# Altium PCB PCBDesign.PcbDoc
Units mm, origin at the board's own origin, x right, y up, seen from the top; angles counter-clockwise.
Board outline 100 x 75 mm, 2 copper layers (Top Layer, Bottom Layer); 33 components, 25 nets, 90 pads, 0 vias.
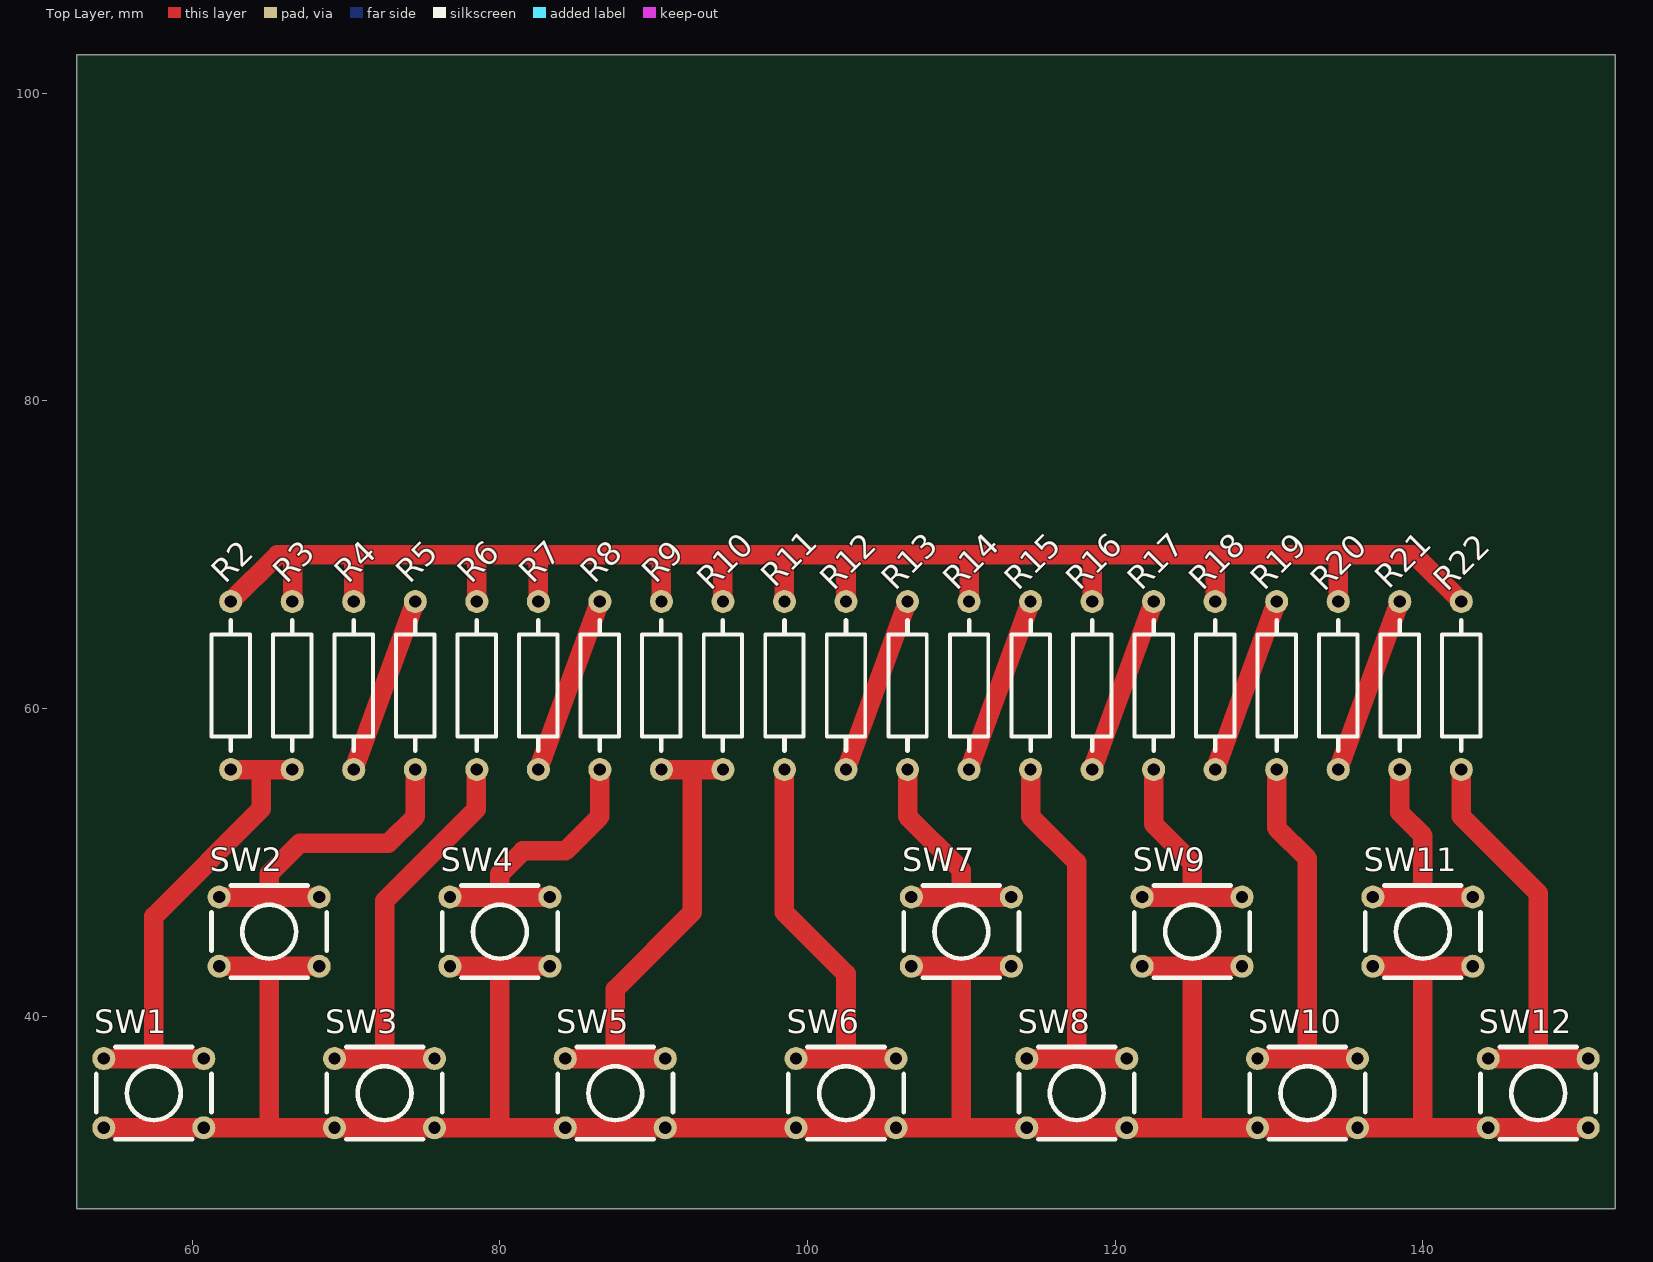
[diagram p0: Top Layer view]
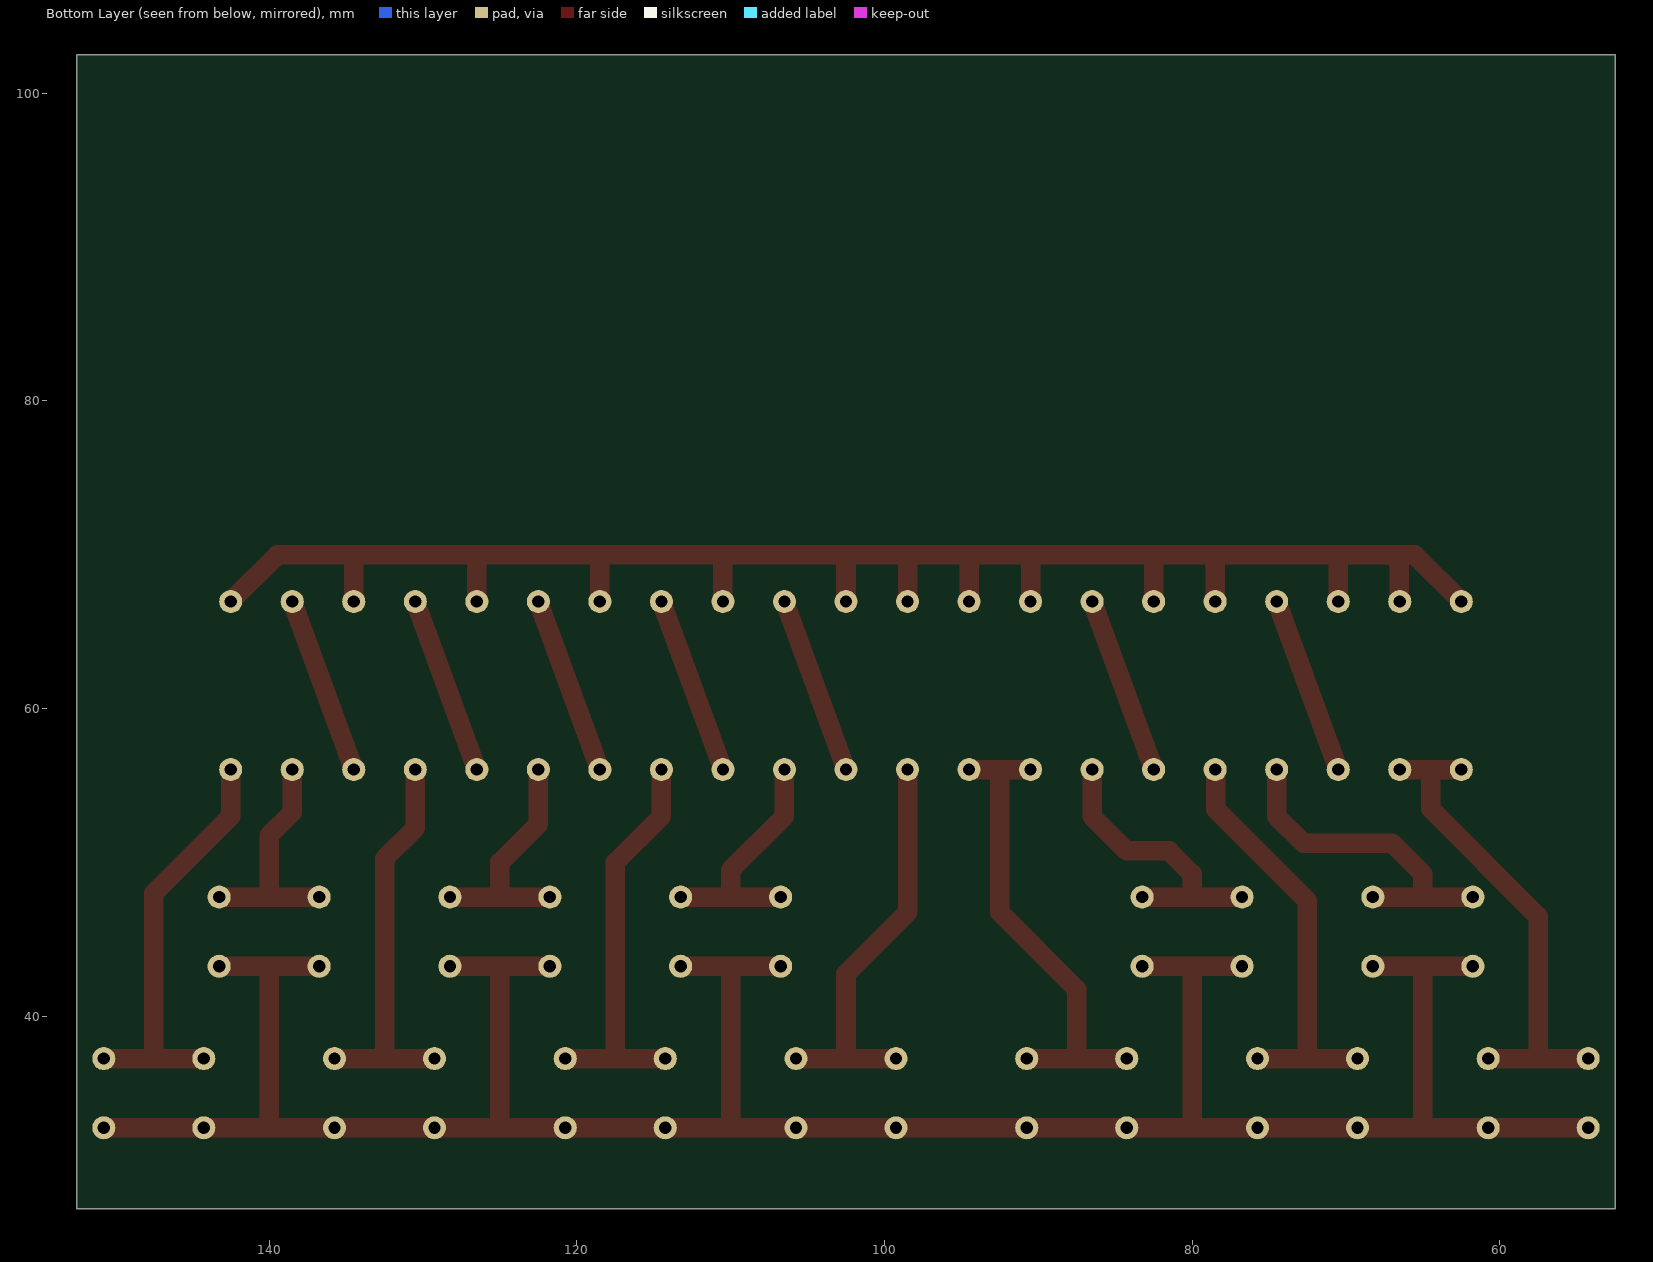
[diagram p1: Bottom Layer view, seen from below]
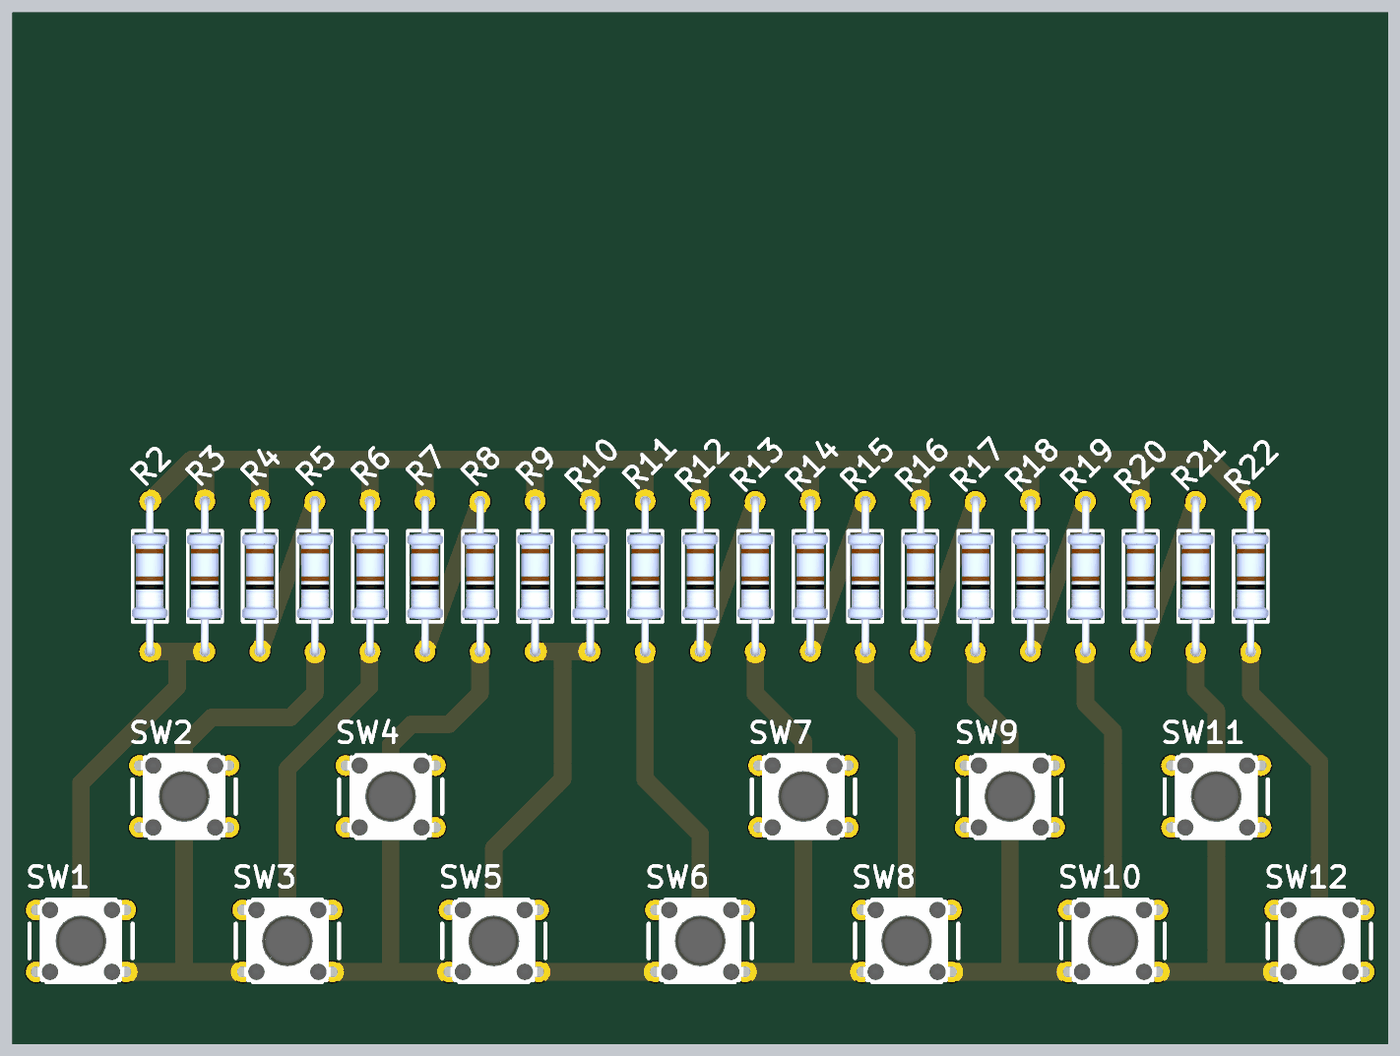
[diagram p2: 3D render of the assembled board from above, using the file's embedded part models]

## Layer stack, top to bottom
Top Solder: solder mask 0.0102, Solder Resist, Dk 3.5
Top Layer: signal copper 0.0356
Dielectric 1: dielectric 0.32, FR-4, Dk 4.8
Bottom Layer: signal copper 0.0356
Bottom Solder: solder mask 0.0102, Solder Resist, Dk 3.5

## Board outline
52.5,27.5 152.5,27.5 152.5,102.5 52.5,102.5

## Design rules (kind name [scope] priority, off if disabled: settings)
Clearance [All] p1: gap=0.15 ignorepadtopadclearanceinfootprint=FALSE
Height [All] p1: minheight=0 maxheight=500 prefheight=12.7
HoleSize [All] p1: absolutevalues=TRUE maxlimit=6.3 minlimit=0.3 maxpercent=80.000 minpercent=20.000
HoleToHoleClearance [All] p1: gap=0.3 allowstackedmicrovias=TRUE
MinimumAnnularRing [All] p1: minimumring=0.15
MinimumSolderMaskSliver [All] p1: minsoldermaskwidth=0.15
PolygonConnect [All] p1: connectstyle=Relief reliefconductorwidth=0.254 reliefentries=4 polygonreliefangle="90 Angle" airgapwidth=0.254
RoutingVias [All] p1: holewidth=0.5 width=1 viastyle="Through Hole" minholewidth=0.3 minwidth=0.6 maxholewidth=6.3 maxwidth=20
SilkToSilkClearance [All] p1: silktosilkclearance=0
SilkToSolderMaskClearance [IsPad] p1: minsilkscreentomaskgap=0.1 clearancetoexposedcopper=TRUE
SolderMaskExpansion [All] p1: expansion=0.102 istentingtop=FALSE
UnRoutedNet [All] p1: checkbadconnections=TRUE
Width [All] p1: maxlimit=100 minlimit=0.15 preferedwidth=1.5
23 further rules are at their usual default settings.

## Components (designator, comment, footprint, x,y, rotation, side; value= is the part's Value field where it differs from the comment)
R2 "150k" Resistor 62.5,61.5 r90 top
R3 "82k" Resistor 66.5,61.5 r90 top
R4 "15k" Resistor 70.5,61.5 r90 top
R5 "15k" Resistor 74.5,61.5 r90 top
R6 "47k" Resistor 78.5,61.5 r90 top
R7 "22k" Resistor 82.5,61.5 r90 top
R8 "22k" Resistor 86.5,61.5 r90 top
R9 "82k" Resistor 90.5,61.5 r90 top
R10 "82k" Resistor 94.5,61.5 r90 top
R11 "39k" Resistor 98.5,61.5 r90 top
R12 "10k" Resistor 102.5,61.5 r90 top
R13 "27k" Resistor 106.5,61.5 r90 top
R14 "12k" Resistor 110.5,61.5 r90 top
R15 "22k" Resistor 114.5,61.5 r90 top
R16 "10k" Resistor 118.5,61.5 r90 top
R17 "22k" Resistor 122.5,61.5 r90 top
R18 "12k" Resistor 126.5,61.5 r90 top
R19 "18k" Resistor 130.5,61.5 r90 top
R20 "10k" Resistor 134.5,61.5 r90 top
R21 "18k" Resistor 138.5,61.5 r90 top
R22 "27k" Resistor 142.5,61.5 r90 top
SW1 "C4" Button 57.5,35 r180 top
SW2 "C#4" Button 65,45.5 r180 top
SW3 "D4" Button 72.5,35 r180 top
SW4 "D#4" Button 80,45.5 r180 top
SW5 "E4" Button 87.5,35 r180 top
SW6 "F4" Button 102.5,35 r180 top
SW7 "F#4" Button 110,45.5 r180 top
SW8 "G4" Button 117.5,35 r180 top
SW9 "G#4" Button 125,45.5 r180 top
SW10 "A5" Button 132.5,35 r180 top
SW11 "A#5" Button 140,45.5 r180 top
SW12 "G5" Button 147.5,35 r180 top

## Footprints (in the part's own frame and the unit in brackets; to place one, negate y for a bottom-side part, rotate by r counter-clockwise, add the part's x,y. Pads: shape width x height; smd on the part's side, far side on the other; paste and mask are expansions set on the pad)
Button [mm]
  round 1.5 hole 0.8: 1(-3.25,2.25) 2(3.25,2.25) 3(-3.25,-2.25) 4(3.25,-2.25)
  silkscreen extent -3.75,-3 3.75,3, body extent -3.6,-3 3.6,3, height 4.7
Resistor [mm]
  round 1.5 hole 0.8: 1(-5.461,0) 2(5.461,0)
  silkscreen extent -4.25,-1.25 4.25,1.25, body extent -5.77,-1.3 5.77,1.3, height 2.6

## Part data
R2 R3 R4 R5 R6 R7 R8 R9 R10 R11 R12 R13 R14 R15 R16 R17 R18 R19 R20 R21 R22: library part Resistor
SW1 SW2 SW3 SW4 SW5 SW6 SW7 SW8 SW9 SW10 SW11 SW12: library part Button

## Nets (pads, with @x,y where several pads share a name; then routed paths per layer and width w, separated by ;. In a path a pad name is that pad's centre, name@x,y a point inside that pad or via, vN(x,y) a via of type N, cw(c..) or ccw(c..) an arc to the next point about the centre after c; other vN are vias at no path point)
GND: 
NetC1_2: SW1.1 SW1.2 SW2.1 SW2.2 SW3.1 SW3.2 SW4.1 SW4.2 SW5.1 SW5.2 SW6.1 SW6.2 SW7.1 SW7.2 SW8.1 SW8.2 SW9.1 SW9.2 SW10.1 SW10.2 SW11.1 SW11.2 SW12.1 SW12.2 | length 181.5
  Top Layer w1.27: SW1.2 SW1.1 SW3.2 SW3.1 SW5.2 SW5.1 SW6.2 SW6.1 SW8.2 SW8.1 SW10.2 SW10.1 140,32.75 ; SW2.2 SW2.1 ; 65,32.75 65,43.25 ; SW4.2 SW4.1 ; 80,32.75 80,43.25 ; SW7.2 SW7.1 ; 110,32.75 110,43.25 ; SW9.2 SW9.1 ; 125,32.75 125,43.25 ; SW11.2 140,43.25 ; SW11.1 140,43.25 ; SW12.1 SW12.2 140,32.75 ; 140,32.75 140,43.25
NetC2_N: 
NetC2_P: 
NetR1_1: R2.2 R3.2 R4.2 R6.2 R7.2 R9.2 R10.2 R11.2 R12.2 R14.2 R16.2 R18.2 R20.2 R22.2 | length 119.2
  Top Layer w1.27: R2.2 65.539,70 67,70 ; R3.2 66.544,67.005 66.544,69.544 67,70 ; R4.2 70.5,70 ; R6.2 78.5,70 ; R7.2 82.5,70 ; R9.2 90.5,70 ; R10.2 94.5,70 ; R11.2 98.5,70 ; R12.2 102.5,70 ; R14.2 110.5,70 ; R16.2 118.5,70 ; R18.2 126.5,70 ; R20.2 134.5,70 ; R22.2 139.461,70 82.5,70 ; 67,70 82.5,70
NetR2_1: R2.1 R3.1 SW1.3 SW1.4 | length 32.2
  Top Layer w1.27: SW1.4 57.5,37.25 ; SW1.3 57.5,37.25 ; R2.1 64.5,56.039 ; R3.1 64.5,56.039 ; 57.5,37.25 57.5,46.5 64.5,53.5 64.5,56.039
NetR4_1: R4.1 R5.2 | length 11.6
  Top Layer w1.27: R4.1 R5.2
NetR5_1: R5.1 SW2.3 SW2.4 | length 22.1
  Top Layer w1.27: SW2.4 65,47.75 ; SW2.3 65,47.75 ; R5.1 74.5,53 72.75,51.25 67,51.25 65,49.25 65,47.75
NetR6_1: R6.1 SW3.3 SW3.4 | length 27.8
  Top Layer w1.27: SW3.4 72.5,37.25 ; SW3.3 72.5,37.25 ; R6.1 78.456,55.995 78.456,53.456 72.5,47.5 72.5,37.25
NetR7_1: R7.1 R8.2 | length 11.6
  Top Layer w1.27: R7.1 R8.2
NetR8_1: R8.1 SW4.3 SW4.4 | length 19.1
  Top Layer w1.27: SW4.4 80,47.75 ; SW4.3 80,47.75 ; R8.1 86.5,53 84.25,50.75 81.5,50.75 80,49.25 80,47.75
NetR9_1: R9.1 R10.1 SW5.3 SW5.4 | length 31.4
  Top Layer w1.27: SW5.4 87.5,37.25 ; R9.1 92.5,56.039 ; SW5.3 87.5,37.25 ; R10.1 92.5,56.039 ; 87.5,37.25 87.5,41.75 92.5,46.75 92.5,56.039
NetR11_1: R11.1 SW6.3 SW6.4 | length 26.9
  Top Layer w1.27: R11.1 98.5,46.75 102.5,42.75 102.5,37.25 ; SW6.4 102.5,37.25 ; SW6.3 102.5,37.25
NetR12_1: R12.1 R13.2 | length 11.6
  Top Layer w1.27: R12.1 R13.2
NetR13_1: R13.1 SW7.3 SW7.4 | length 16.2
  Top Layer w1.27: R13.1 106.5,53 110,49.5 110,47.75 ; SW7.4 110,47.75 ; SW7.3 110,47.75
NetR14_1: R14.1 R15.2 | length 11.6
  Top Layer w1.27: R14.1 R15.2
NetR15_1: R15.1 SW8.3 SW8.4 | length 26.5
  Top Layer w1.27: SW8.4 117.5,37.25 ; R15.1 114.5,53 117.5,50 117.5,37.25 ; SW8.3 117.5,37.25
NetR16_1: R16.1 R17.2 | length 11.6
  Top Layer w1.27: R16.1 R17.2
NetR17_1: R17.1 SW9.3 SW9.4 | length 15.8
  Top Layer w1.27: SW9.4 125,47.75 ; R17.1 122.5,52.5 125,50 125,47.75 ; SW9.3 125,47.75
NetR18_1: R18.1 R19.2 | length 11.6
  Top Layer w1.27: R18.1 R19.2
NetR19_1: R19.1 SW10.3 SW10.4 | length 26.1
  Top Layer w1.27: SW10.4 132.5,37.25 ; R19.1 130.5,52.25 132.5,50.25 132.5,37.25 ; SW10.3 132.5,37.25
NetR20_1: R20.1 R21.2 | length 11.6
  Top Layer w1.27: R20.1 R21.2
NetR21_1: R21.1 SW11.3 SW11.4 | length 15.4
  Top Layer w1.27: SW11.4 140,47.75 ; R21.1 138.5,53.25 140,51.75 140,47.75 ; SW11.3 140,47.75
NetR22_1: R22.1 SW12.3 SW12.4 | length 27.4
  Top Layer w1.27: R22.1 142.5,53 147.5,48 147.5,37.25 ; SW12.4 147.5,37.25 ; SW12.3 147.5,37.25
VCC: 

## Silkscreen, mask and mechanical layers (free items; w line width, h text height)
Mechanical 1:
  the board outline again, w0.3